# Altium PCB mark3.PcbDoc
Units mm, origin at the board's own origin, x right, y up, seen from the top; angles counter-clockwise.
Board outline 127 x 101.6 mm, 4 copper layers (Top Layer, Internal Plane 1, Internal Plane 2, Bottom Layer); 8 components, 21 nets, 120 pads, 0 vias.
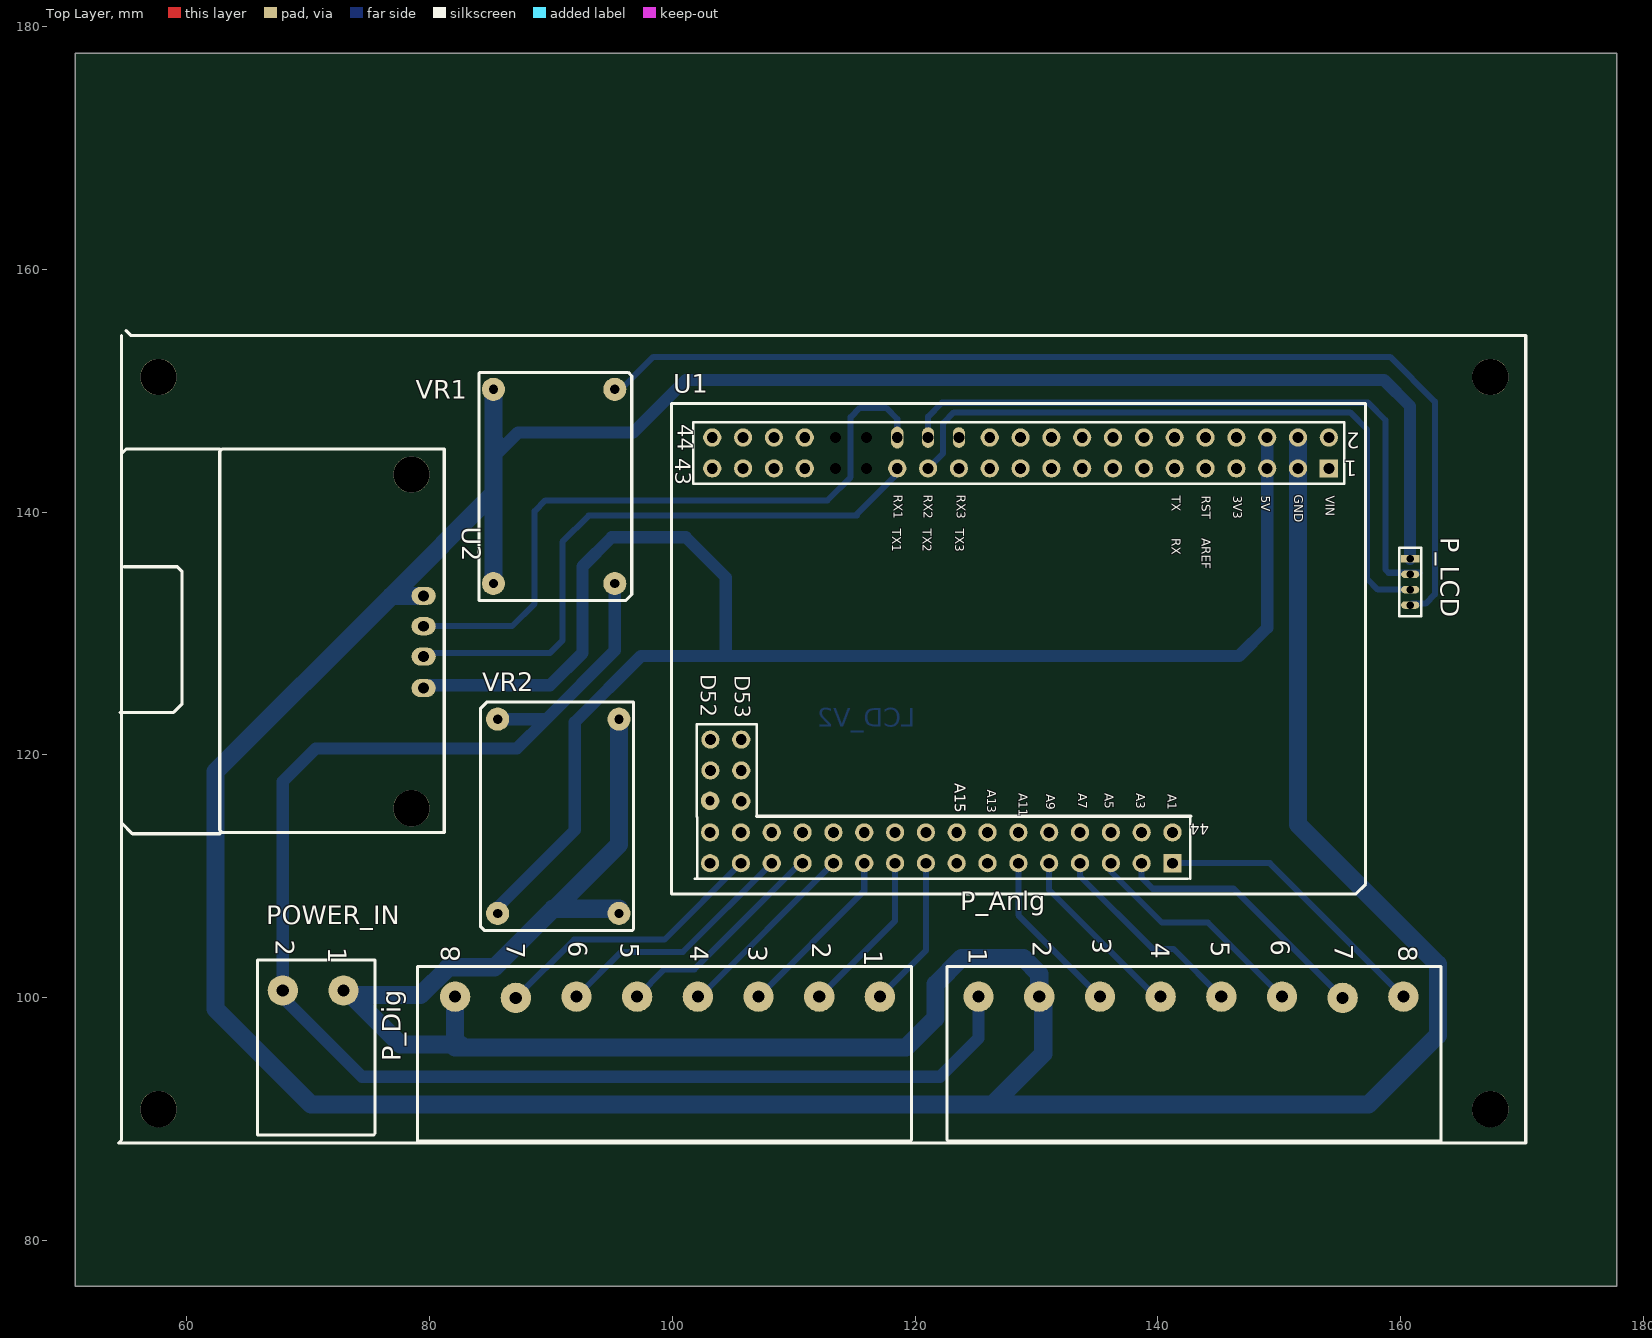
[diagram p0: Top Layer view]
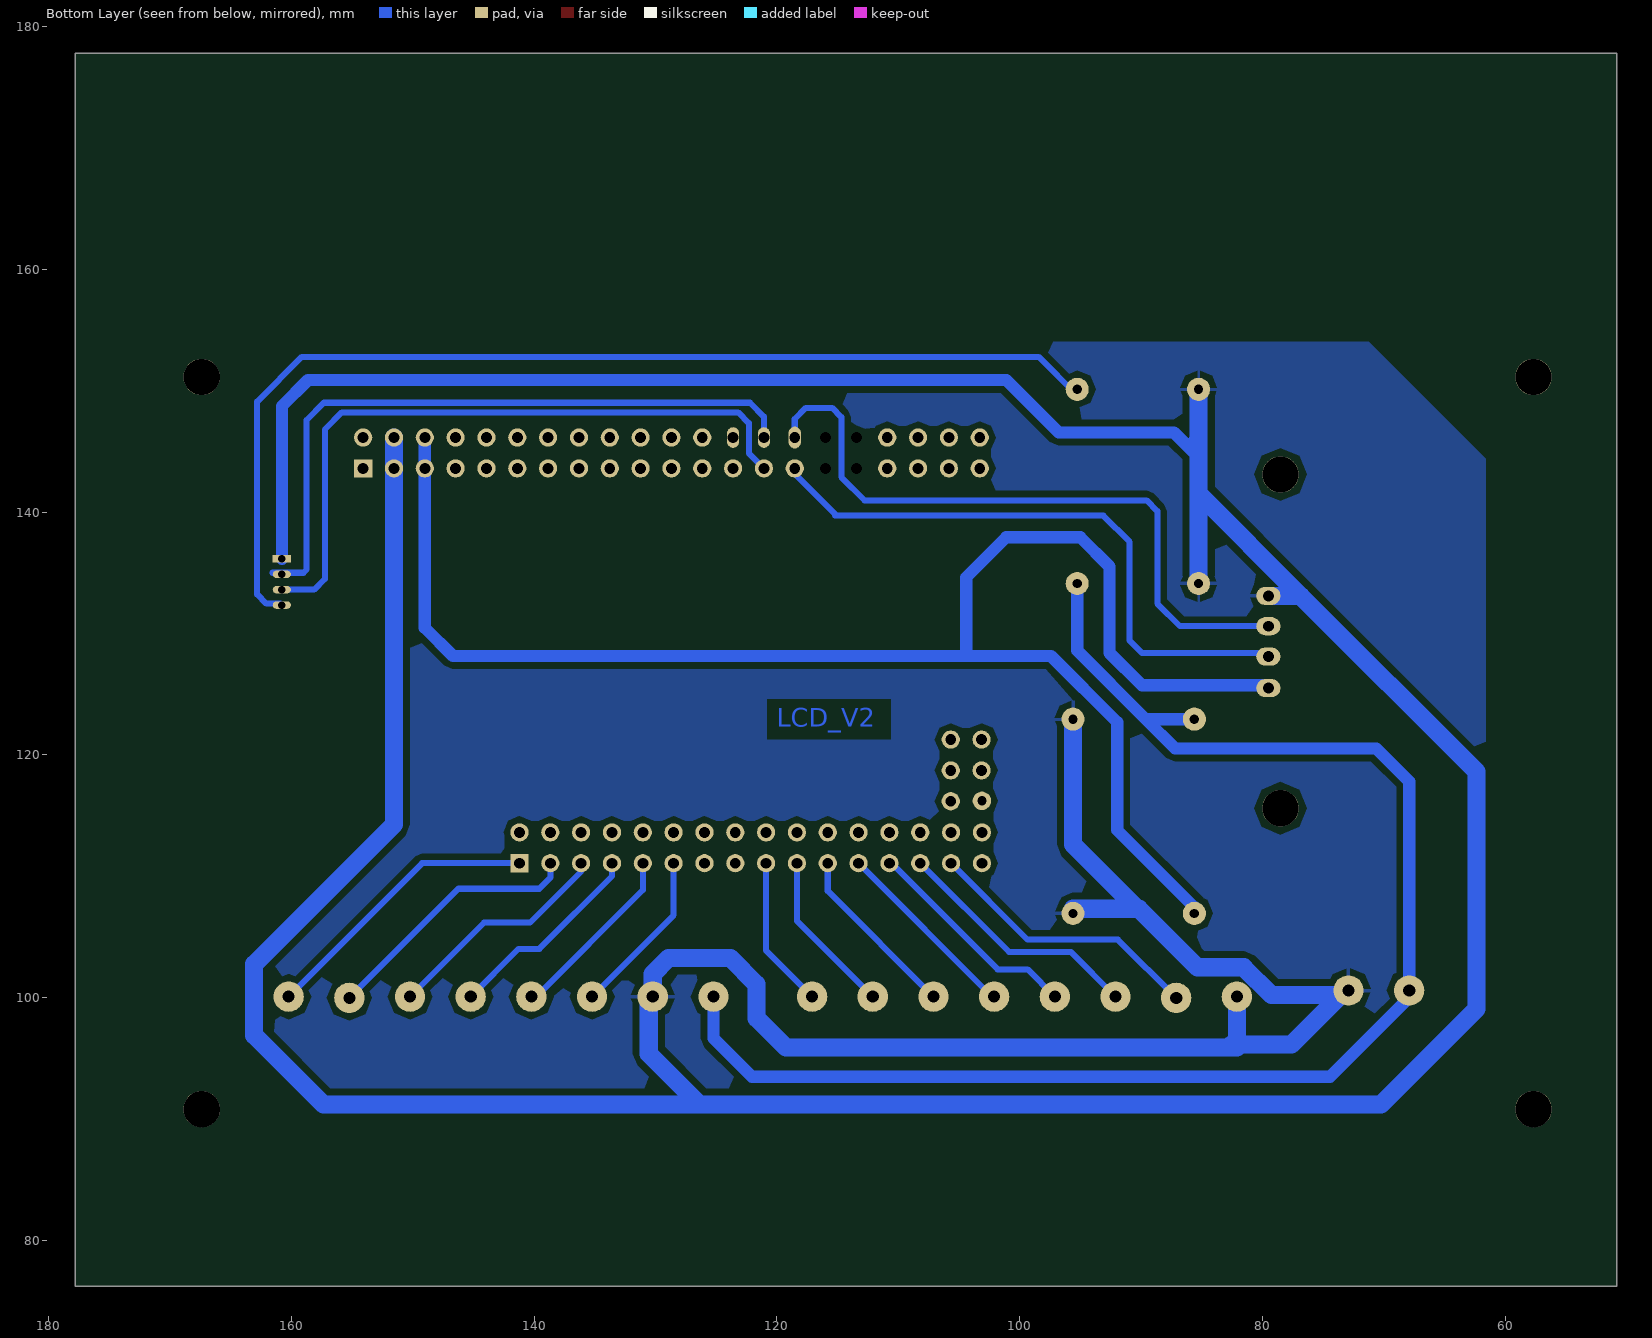
[diagram p1: Bottom Layer view, seen from below]
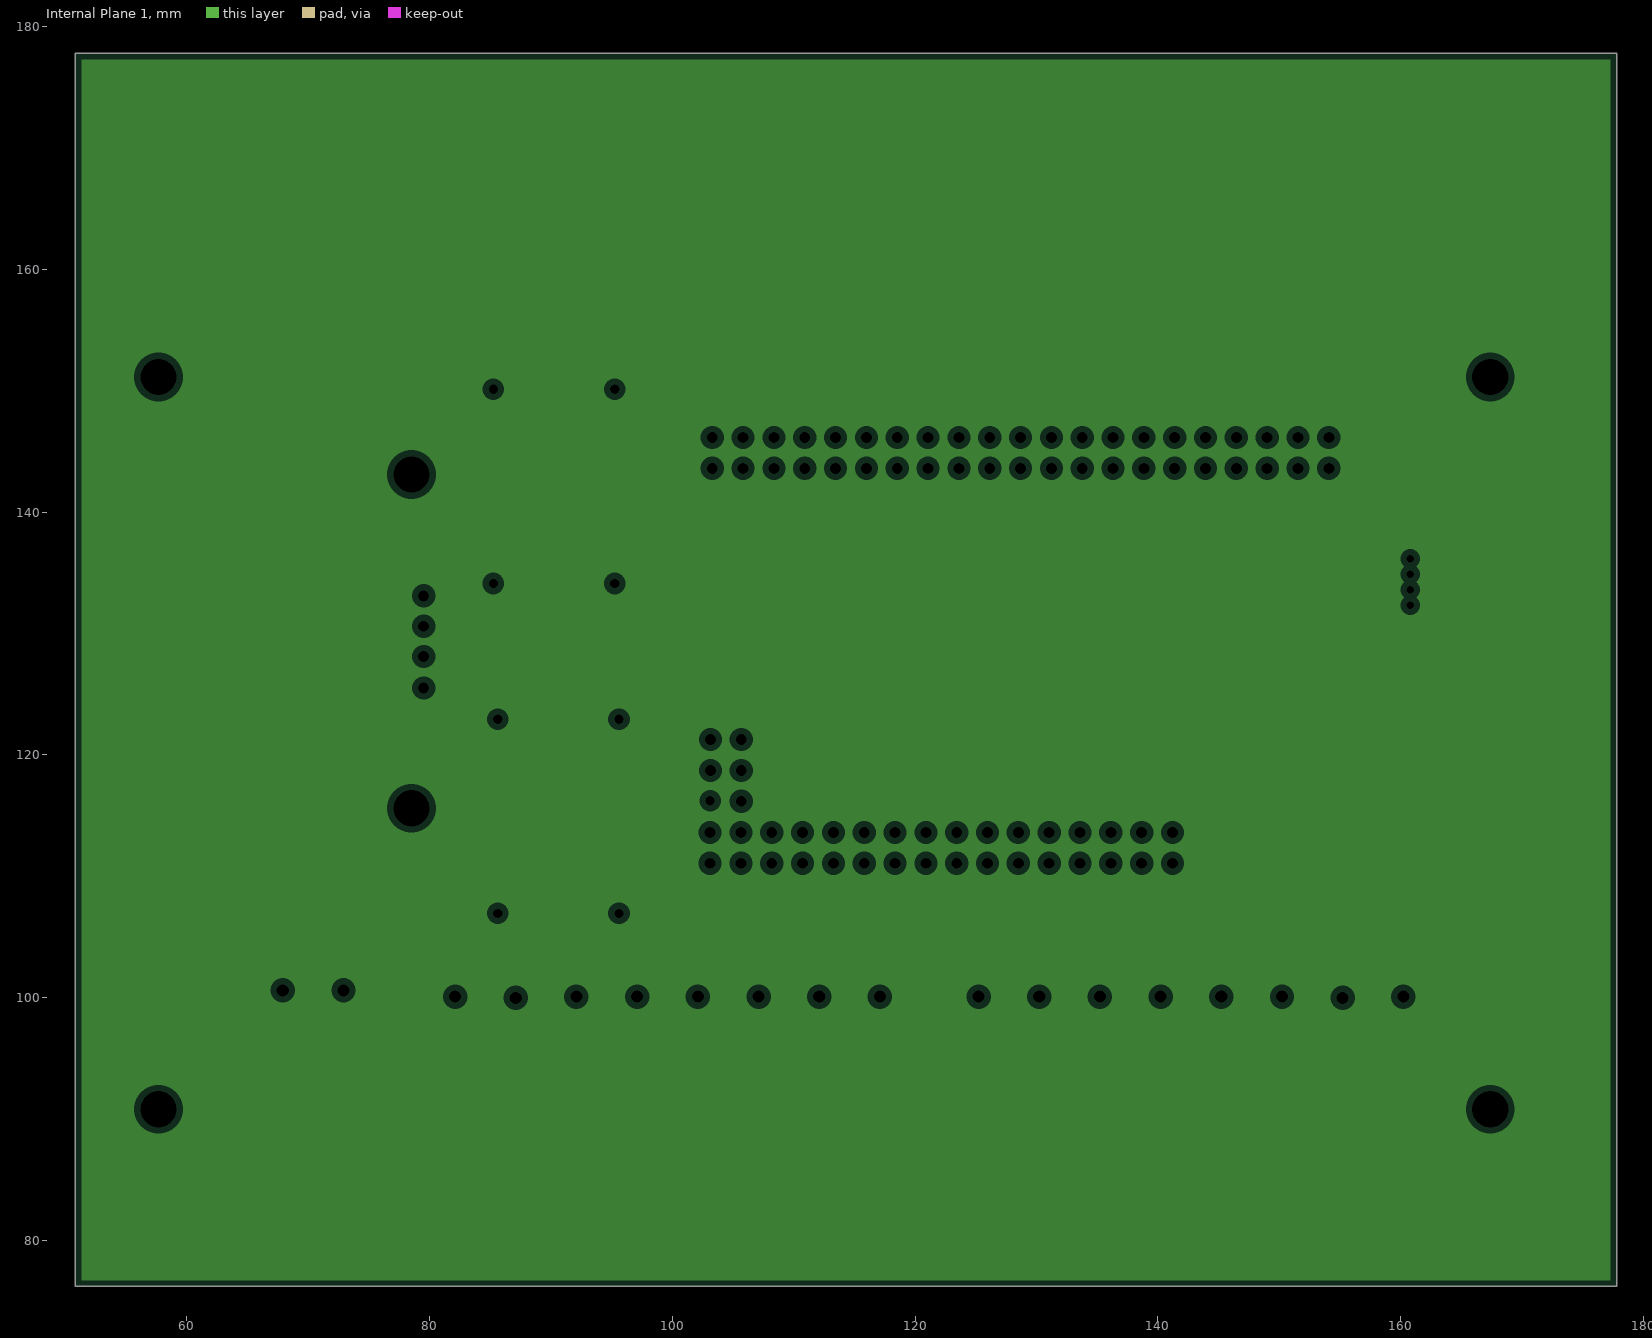
[diagram p2: Internal Plane 1, clearances drawn from the general rule]
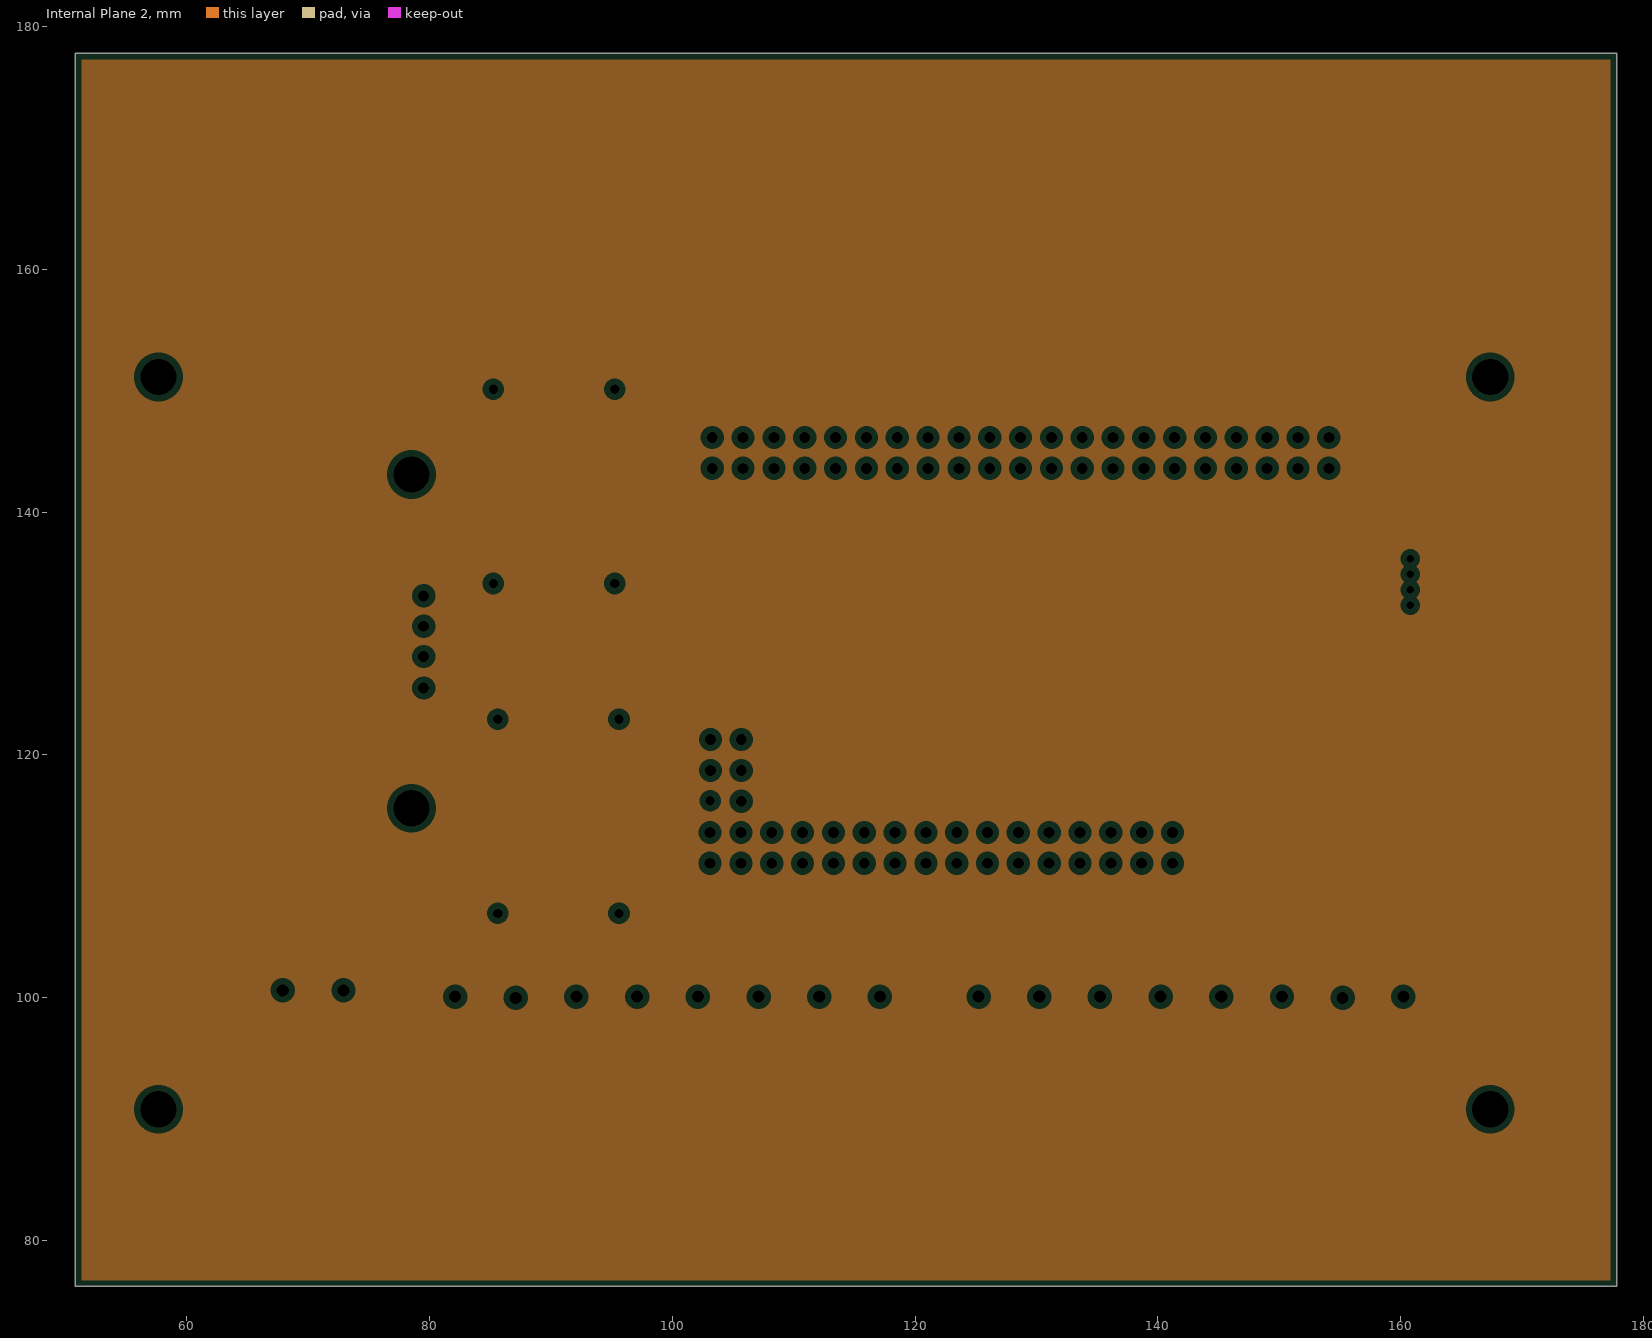
[diagram p3: Internal Plane 2, clearances drawn from the general rule]

## Layer stack, top to bottom
Top Layer: signal copper 0.0356
Dielectric: dielectric 0.32, FR-4, Dk 4.8
Internal Plane 1: plane copper 0.0356
Dielectric: dielectric 0.32, FR-4, Dk 4.8
Internal Plane 2: plane copper 0.0356
Dielectric: dielectric 0.32, FR-4, Dk 4.8
Bottom Layer: signal copper 0.0356

## Board outline
50.8,76.2 177.8,76.2 177.8,177.8 50.8,177.8

## Design rules (kind name [scope] priority, off if disabled: settings)
Clearance [All] p1: gap=0.5
PlaneClearance [All] p1: clearance=0.508
PlaneConnect [All] p1: planeconnectstyle=Relief reliefexpansion=0.508 reliefentries=4 reliefconductorwidth=0.254 reliefairgap=0.254
PolygonConnect [All] p1: connectstyle=Relief reliefconductorwidth=0.254 reliefentries=4 polygonreliefangle="90 Angle"
RoutingVias [All] p1: holewidth=0.8 width=1.6 viastyle="Through Hole" minholewidth=0.711 minwidth=1.27 maxholewidth=0.711 maxwidth=1.27
SilkscreenOverComponentPads [All] p1: minsilkscreentomaskgap=0.254
SolderMaskExpansion [All] p1: expansion=0.102
TestPointUsage [All] p1: valid=0 allowmultiple=FALSE
Testpoint [All] p1: side=15 testpointundercomponent=TRUE minsize=1.016 maxsize=2.54 preferedsize=1.524 minholesize=0 maxholesize=1.016 preferedholesize=0.813 testpointgrid=0.025 style=1023 order=0-112345678
Width [All] p1: maxlimit=2 minlimit=0.3 preferedwidth=0.5
21 further rules are at their usual default settings.

## Components (designator, comment, footprint, x,y, rotation, side; value= is the part's Value field where it differs from the comment)
P_Anlg "Header 8" TERM_8P_GREEN#1 125.222,100.076 r270 top
P_Dig "Header 8" TERM_8P_GREEN#2 117.094,100.076 r270 top
P_LCD "MHDR1X4" MHDR1X4 160.782,136.144 r270 top
POWER_IN "Term_2Pin_Green" TERM_2P_GREEN 72.898,100.584 r270 top
U1 "Arduino MEGA EMBEDED" ARDUINOMEGA 101.219,154.94 r270 top
U2 "RS232_TTL" RS232_TTL 79.502,133.096 r270 top
VR1 "MODUL_LM259" MODUL_LM259 95.25,134.112 r90 top (schematic designator VR2)
VR2 "MODUL_LM259" MODUL_LM259 85.598,122.936 r270 top (schematic designator VR1)

## Footprints (in the part's own frame and the unit in brackets; to place one, negate y for a bottom-side part, rotate by r counter-clockwise, add the part's x,y. Pads: shape width x height; smd on the part's side, far side on the other; paste and mask are expansions set on the pad)
ARDUINOMEGA [mm]
  rect 1.5x1.5 hole 0.9: 1(11.339,52.863) 43(43.871,39.983)
  round 1.5 hole 0.9: 2(8.799,52.863) 3(11.339,50.323) 4(8.799,50.323) 5(11.339,47.783) 6(8.799,47.783) 7(11.339,45.243) 8(8.799,45.243) 9(11.339,42.703) 10(8.799,42.703) 11(11.339,40.163) 12(8.799,40.163) 13(11.339,37.623) 14(8.799,37.623) 15(11.339,35.083) 16(8.799,35.083) 17(11.339,32.543) 18(8.799,32.543) 19(11.339,30.003) 20(8.799,30.003) 21(11.339,27.463) 22(8.799,27.463) 23(11.339,24.923) 24(8.799,24.923) 25(11.339,22.383) 27(11.339,19.843) 29(11.339,17.303) 35(11.339,9.683) 36(8.799,9.683) 37(11.339,7.143) 38(8.799,7.143) 39(11.339,4.603) 40(8.799,4.603) 41(11.339,2.063) 42(8.799,2.063) 44(41.331,39.983) 45(43.871,37.443) 46(41.331,37.443) 47(43.871,34.903) 48(41.331,34.903) 49(43.871,32.363) 50(41.331,32.363) 51(43.871,29.823) 52(41.331,29.823) 53(43.871,27.283) 54(41.331,27.283) 55(43.871,24.743) 56(41.331,24.743) 57(43.871,22.203) 58(41.331,22.203) 59(43.871,19.663) 60(41.331,19.663) 61(43.871,17.123) 62(41.331,17.123) 63(43.871,14.583) 64(41.331,14.583) 65(43.871,12.043) 66(41.331,12.043) 67(43.871,9.503) 68(41.331,9.503) 69(43.871,6.963) 70(41.331,6.963) 71(43.871,4.423) 72(41.331,4.423) 73(43.871,1.883) 74(41.331,1.883) 76(38.765,4.449) 77(36.225,1.909) 78(36.225,4.449) 79(33.685,1.909) 80(33.685,4.449)
  oval 1.7x1 hole 0.9: 26(8.799,22.383) 28(8.799,19.843)
  oval 1.8x1 hole 0.9: 30(8.799,17.303)
  round 0.2 hole 0.9: 31(11.339,14.763) 32(8.799,14.763)
  round 0.1 hole 0.9: 33(11.339,12.223) 34(8.799,12.223)
  round 1.524 hole 0.762: 75(38.731,1.883)
  silkscreen extent 6,-1.3 46.4,55.9
MHDR1X4 [mm] "Connector; Header; 4 Position"
  rect 0.6x1.5 hole 0.6: 1(0,0)
  oval 0.6x1.5 hole 0.6: 2(1.27,0) 3(2.54,0) 4(3.81,0)
  silkscreen extent -0.9,-0.9 4.71,0.9
MODUL_LM259 [mm]
  round 1.9 hole 0.762: 1(0,10) 2(0,0) 3(16,10) 4(16,0)
  silkscreen extent -1.4,-1.4 17.4,11.2
RS232_TTL [mm]
  round 3 hole 3: 0(-10,-1) 0(17.5,-1)
  oval 1.5x2 hole 0.9: 1(7.6,0) 2(5,0) 3(2.5,0) 4(0,0)
  silkscreen extent -12.1,-25 19.6,1.7
TERM_2P_GREEN [mm]
  round 2.5 hole 1: 1(0,0) 2(0,-5)
  silkscreen extent -2.5,-7.1 11.9,2.6
TERM_8P_GREEN#1 [mm]
  round 2.5 hole 1: 1(0,0) 2(0,5) 3(0,10) 4(0,15) 5(0,20) 6(0,25) 7(0.1,30) 8(0,35)
  silkscreen extent -2.5,-2.6 11.9,38.1
TERM_8P_GREEN#2 [mm]
  round 2.5 hole 1: 1(0,0) 2(0,-5) 3(0,-10) 4(0,-15) 5(0,-20) 6(0,-25) 7(0.1,-30) 8(0,-35)
  silkscreen extent -2.5,-38.1 11.9,2.6

## Part data
P_Anlg P_Dig: "Header, 8-Pin"
P_LCD: "Header, 4-Pin"
POWER_IN: library part Term_2Pin_Blck

## Free pads (board coordinates)
  round 3 hole 3: 0(57.658,90.805) 0(57.658,151.13) 0(167.386,90.805) 0(167.386,151.13)

## Nets (pads, with @x,y where several pads share a name; then routed paths per layer and width w, separated by ;. In a path a pad name is that pad's centre, name@x,y a point inside that pad or via, vN(x,y) a via of type N, cw(c..) or ccw(c..) an arc to the next point about the centre after c; other vN are vias at no path point)
5V_LCD: P_LCD.4 VR1.4 | length 88.5
  Bottom Layer w0.5: VR1.4@95.25,149.606 98.425,152.781 159.131,152.781 162.814,149.098 162.814,133.223 162.052,132.461 P_LCD.4@160.909,132.461
5V_U1: U1.5 U1.6 U2.1 VR2.4 | length 135.8
  Bottom Layer w1: U2.1@79.756,125.73 89.916,125.73 92.583,128.397 92.583,135.509 94.996,137.922 101.092,137.922 104.394,134.62 104.394,128.143 ; VR2.4@85.598,107.442 91.948,113.792 91.948,122.682 97.409,128.143 104.394,128.143 ; 104.14,128.143 104.394,128.143 ; U1.6 U1.5 149.002,130.46 146.685,128.143 104.394,128.143
D1: P_Dig.1 U1.59 | length 12.6
  Bottom Layer w0.5: P_Dig.1 120.882,103.864 U1.59
D2: P_Dig.2 U1.61 | length 13.6
  Bottom Layer w0.5: P_Dig.2 118.342,106.324 U1.61
D3: P_Dig.3 U1.63 | length 14.6
  Bottom Layer w0.5: P_Dig.3 115.802,108.784 U1.63
D4: P_Dig.4 U1.65 | length 15.7
  Bottom Layer w0.5: P_Dig.4 102.269,100.076 U1.65
D5: P_Dig.5 U1.67 | length 18.2
  Bottom Layer w0.5: P_Dig.5 99.342,102.324 101.796,102.324 110.541,111.069 U1.67
D6: P_Dig.6 U1.69 | length 20.6
  Bottom Layer w0.5: P_Dig.6 95.777,103.759 100.872,103.759 U1.69
D7: P_Dig.7 U1.71 | length 23.1
  Bottom Layer w0.5: P_Dig.7 91.893,104.775 99.348,104.775 U1.71
GND: P_Anlg.2 P_Dig.8 P_LCD.1 POWER_IN.1 U1.3 U1.4 U2.4 VR1.1 VR1.3 VR2.1 VR2.3 | length 445.2
  Bottom Layer w1: 85.25,144.526 87.282,146.558 96.774,146.558 101.092,150.876 158.623,150.876 160.782,148.717 P_LCD.1
  Bottom Layer w1.5: POWER_IN.1 73.152,100.584 77.597,96.139 82.55,96.139 ; POWER_IN.1@73.787,100.203 79.248,100.203 81.534,102.489 85.344,102.489 90.17,107.315 VR2.3@95.598,107.315 ; U2.4 76.835,133.096 ; P_Dig.8 82.094,98.985 82.094,95.885 119.253,95.885 121.666,98.298 121.666,101.092 123.825,103.251 128.905,103.251 130.222,101.934 P_Anlg.2 130.556,99.742 130.556,95.377 126.365,91.186 ; VR1.1@85.25,134.78 85.25,141.511 ; VR1.3 85.25,145.923 ; 85.377,145.796 85.25,145.923 ; 90.678,107.696 95.598,112.616 VR2.1@95.598,122.301 ; U1.4 U1.3 151.542,114.269 163.068,102.743 163.068,96.901 157.353,91.186 70.231,91.186 62.357,99.06 62.357,118.618 76.835,133.096 ; 76.835,133.096 85.25,141.511 ; 85.25,141.511 85.25,145.923
POT1: P_Anlg.8 U1.43 | length 23.6
  Bottom Layer w0.5: U1.43 149.229,111.069 P_Anlg.8
POT2: P_Anlg.7 U1.45 | length 21.9
  Bottom Layer w0.5: U1.45 138.662,109.877 139.573,108.966 146.232,108.966 P_Anlg.7
POT3: P_Anlg.6 U1.47 | length 19.1
  Bottom Layer w0.5: U1.47 136.122,110.385 140.335,106.172 144.126,106.172 P_Anlg.6
POT4: P_Anlg.5 U1.49 | length 16.8
  Bottom Layer w0.5: U1.49 133.582,110.004 139.573,104.013 141.285,104.013 P_Anlg.5
POT5: P_Anlg.4 U1.51 | length 15
  Bottom Layer w0.5: U1.51 131.042,108.861 139.827,100.076 P_Anlg.4
POT6: P_Anlg.3 U1.53 | length 13.8
  Bottom Layer w0.5: U1.53 128.502,106.796 P_Anlg.3
RX1: U1.30 U2.3 | length 55.7
  Bottom Layer w0.5: U2.3 86.781,130.596 88.646,132.461 88.646,140.081 89.535,140.97 112.776,140.97 114.681,142.875 114.681,147.828 115.443,148.59 117.602,148.59 118.522,147.67 U1.30
RX2: P_LCD.2 U1.28 | length 55.7
  Bottom Layer w0.5: U1.28 121.062,147.859 122.212,149.009 157.315,149.009 158.75,147.574 158.75,135.255 159.004,135.001 161.544,135.001
TX1: U1.29 U2.2 | length 49.4
  Bottom Layer w0.5: U2.2@80.391,128.397 89.916,128.397 90.932,129.413 90.932,137.541 93.091,139.7 115.189,139.7 ; 115.189,139.827 118.522,143.16 U1.29
TX2: P_LCD.3 U1.27 | length 55.9
  Bottom Layer w0.5: U1.27 122.301,144.84 122.301,147.32 123.19,148.209 155.829,148.209 157.226,146.812 157.226,134.493 158.115,133.604 P_LCD.3@160.363,133.604
VR1: P_Anlg.1 POWER_IN.2 VR1.2 VR2.2 | length 124.1
  Bottom Layer w1: POWER_IN.2@67.898,100.791 POWER_IN.2 ; VR2.2 89.595,122.936 ; VR1.2 95.25,128.591 89.595,122.936 ; P_Anlg.1 125.222,96.647 122.047,93.472 74.422,93.472 67.898,99.996 POWER_IN.2 ; POWER_IN.2 67.898,117.809 70.612,120.523 87.182,120.523 89.595,122.936
pads on no net: U1.1 U1.2 U1.7 U1.8 U1.9 U1.10 U1.11 U1.12 U1.13 U1.14 U1.15 U1.16 U1.17 U1.18 U1.19 U1.20 U1.21 U1.22 U1.23 U1.24 U1.25 U1.26 U1.31 U1.32 U1.33 U1.34 U1.35 U1.36 U1.37 U1.38 U1.39 U1.40 U1.41 U1.42 U1.44 U1.46 U1.48 U1.50 U1.52 U1.54 U1.55 U1.56 U1.57 U1.58 U1.60 U1.62 U1.64 U1.66 U1.68 U1.70 U1.72 U1.73 U1.74 U1.75 U1.76 U1.77 U1.78 U1.79 U1.80 U2.0

## Polygon pours and split planes (outlines as drawn)
GND on Bottom Layer "Bottom Layer-No Net" (solid, remove dead copper, pour order 1000): 71.247,154.051 61.595,144.399 61.595,88.519 62.103,88.011 164.338,88.011 164.338,154.051 164.465,154.178 164.338,154.051 71.247,154.051
no net on Internal Plane 1 (split plane): 177.29,76.71 51.31,76.71 51.31,177.29 177.29,177.29
no net on Internal Plane 2 (split plane): 177.29,76.71 51.31,76.71 51.31,177.29 177.29,177.29

## Other copper
Bottom Layer:
  text "LCD_V2" at 120.015,122.301 h1.52

## Silkscreen, mask and mechanical layers (free items; w line width, h text height)
Top Overlay:
  lines w0.254: 54.61,154.559 54.61,88.265 54.356,88.011 170.307,88.011 170.307,154.559 55.372,154.559 54.991,154.94
Drill Drawing:
  text ".LEGEND" at 182.88,81.28 h1.52
  text "Drill Drawing." at 182.88,78.74 h1.52

## Text inside footprints (layer, text, board x,y; h text height)
P_Anlg: Top Overlay "8" at 159.822,104.276 h1.52 r270; Top Overlay "7" at 154.559,104.394 h1.52 r270; Top Overlay "6" at 149.352,104.775 h1.52 r270; Top Overlay "5" at 144.399,104.648 h1.52 r270; Top Overlay "4" at 139.446,104.521 h1.52 r270; Top Overlay "3" at 136.144,104.902 h1.52 r90; Top Overlay "2" at 129.667,104.648 h1.52 r270; Top Overlay "1" at 124.422,104.076 h1.52 r270
P_Dig: Top Overlay "8" at 82.494,104.276 h1.52 r90; Top Overlay "7" at 86.36,104.521 h1.52 r270; Top Overlay "6" at 91.44,104.648 h1.52 r270; Top Overlay "5" at 95.758,104.521 h1.52 r270; Top Overlay "4" at 101.473,104.267 h1.52 r270; Top Overlay "3" at 107.823,104.267 h1.52 r90; Top Overlay "2" at 111.506,104.521 h1.52 r270; Top Overlay "1" at 115.824,103.886 h1.52 r270
POWER_IN: Top Overlay "1" at 71.628,104.14 h1.52 r270; Top Overlay "2" at 67.31,104.775 h1.52 r270
U1: Top Overlay "RX1" at 118.219,141.44 h0.72 r270; Top Overlay "TX1" at 118.119,138.64 h0.72 r270; Top Overlay "RX2" at 120.719,141.44 h0.72 r270; Top Overlay "TX2" at 120.619,138.64 h0.72 r270; Top Overlay "RX" at 141.119,137.84 h0.72 r270; Top Overlay "TX" at 141.119,141.34 h0.72 r270; Top Overlay "AREF" at 143.619,137.84 h0.72 r270; Top Overlay "RST" at 143.619,141.34 h0.72 r270; Top Overlay "3V3" at 146.219,141.34 h0.72 r270; Top Overlay "5V" at 148.519,141.34 h0.72 r270; Top Overlay "GND" at 151.219,141.44 h0.72 r270; Top Overlay "VIN" at 153.819,141.34 h0.72 r270; Top Overlay "2" at 156.619,146.54 h1.27 r180; Top Overlay "1" at 156.419,144.24 h1.27 r180; Top Overlay "44" at 100.419,147.24 h1.27 r270; Top Overlay "43" at 100.219,144.44 h1.27 r270; Top Overlay "D52" at 102.319,126.64 h1.27 r270; Top Overlay "D53" at 105.119,126.54 h1.27 r270; Top Overlay "44" at 144.219,114.64 h1.52 r180; Top Overlay "A15" at 122.919,117.64 h1.52 r270; Top Overlay "A1" at 140.819,116.74 h0.72 r270; Top Overlay "A3" at 138.219,116.84 h0.72 r270; Top Overlay "A5" at 135.619,116.84 h0.72 r270; Top Overlay "A7" at 133.419,116.84 h0.72 r270; Top Overlay "A9" at 130.819,116.74 h0.72 r270; Top Overlay "A11" at 128.519,116.84 h0.72 r270; Top Overlay "A13" at 125.919,117.14 h0.72 r270; Top Overlay "TX3" at 123.319,138.64 h0.72 r270; Top Overlay "RX3" at 123.419,141.44 h0.72 r270